# Altium PCB KOTROLER_TRANSPORTA.PcbDoc (part 3 of 4)
Units mm, origin at the board's own origin, x right, y up, seen from the top; angles counter-clockwise.
Board outline 160 x 100 mm, 2 copper layers (Top Layer, Bottom Layer); 436 components, 440 nets, 1414 pads, 154 vias.
Unrouted connection lines stored in the file: 1.
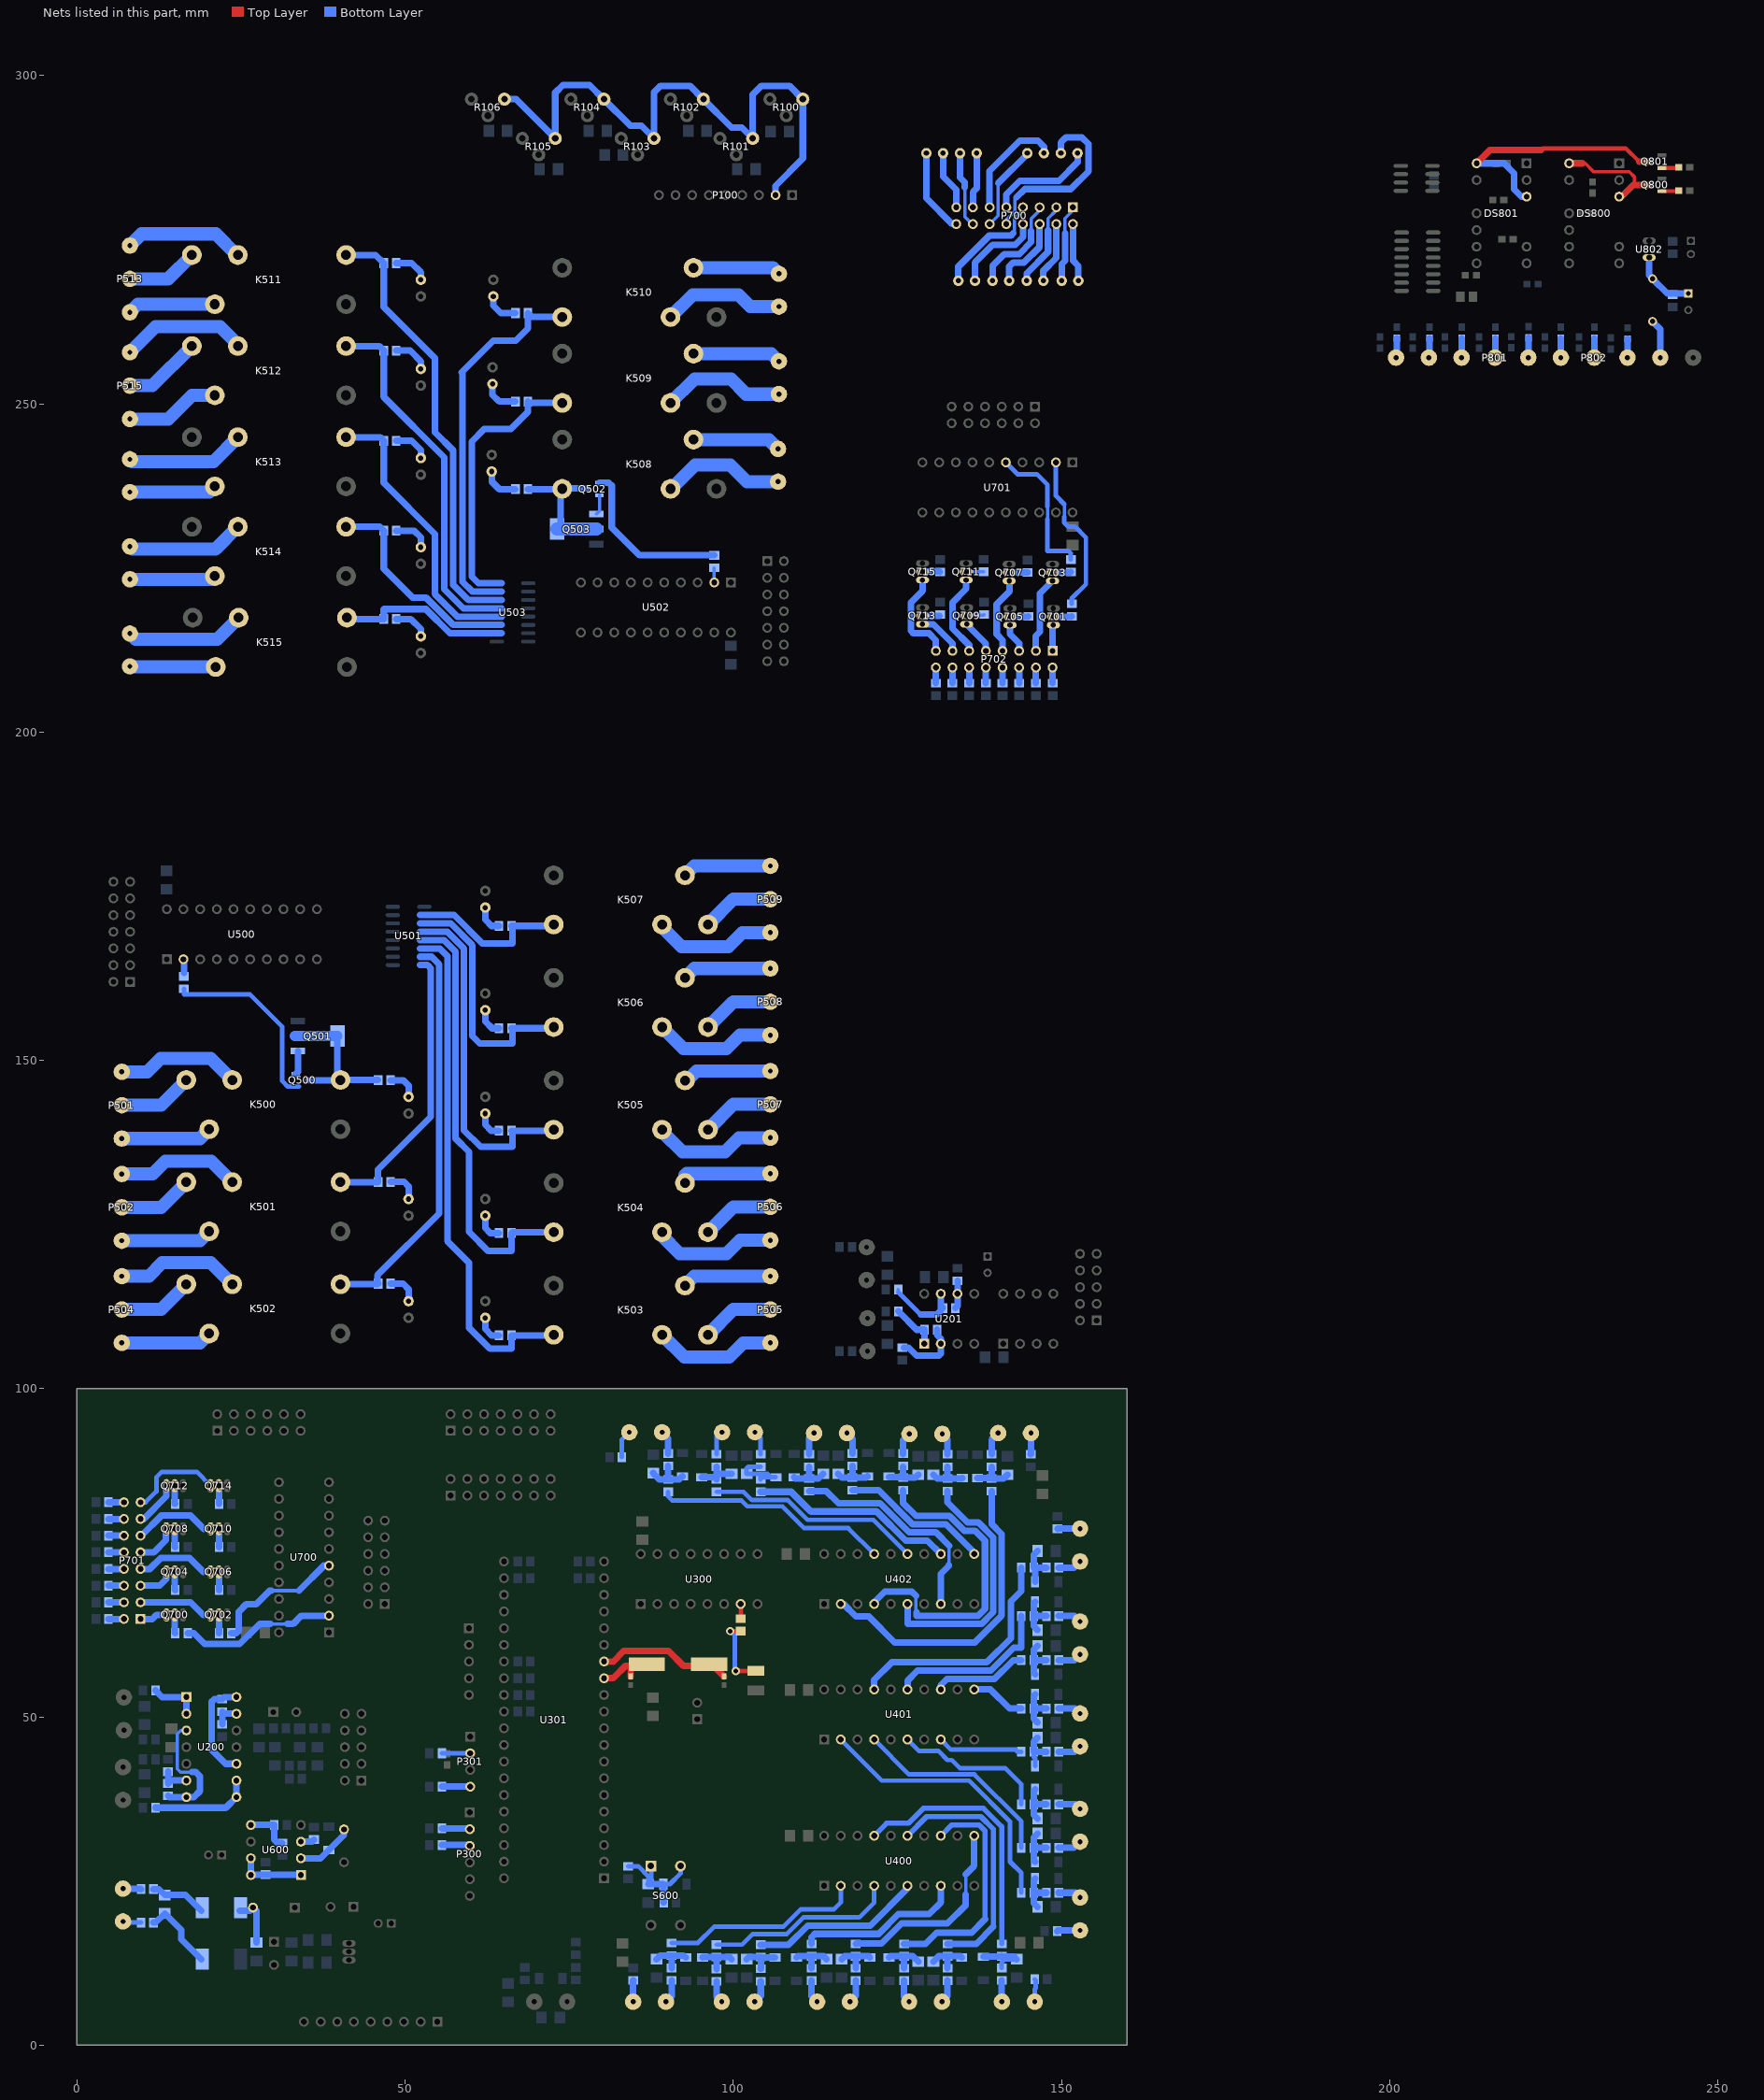
[diagram p3: the nets of this part, all layers, seen from the top]

## Via types
v1: diameter 1.27, hole 0.711, Top Layer to Bottom Layer, 154 vias

## Nets (pads, with @x,y where several pads share a name; then routed paths per layer and width w, separated by ;. In a path a pad name is that pad's centre, name@x,y a point inside that pad or via, vN(x,y) a via of type N, cw(c..) or ccw(c..) an arc to the next point about the centre after c; other vN are vias at no path point) (continued)
NetC303_2: C303.2 U301.14 Y300.2 | length 20.6
  Top Layer w0.7: Y300.2@96.223,57.818 Y300.2@96.949,57.818
  Top Layer w1: U301.14@80.297,58.453 81.694,58.453 83.312,60.071 90.109,60.071 92.362,57.818 Y300.2@96.223,57.818 ; Y300.2@96.949,57.818 C303.2@98.585,56.182
NetC304_2: C304.2 U301.13 Y300.1 | length 9
  Top Layer w1: U301.13@80.297,55.913 81.694,55.913 83.599,57.818 Y300.1@84.615,57.818 ; C304.2@84.361,56.182 84.361,57.564 Y300.1@84.615,57.818 ; Y300.1@86.723,57.818 Y300.1@84.615,57.818
NetC402_1: C402.1 D400.2 R401.2 R402.1 | length 6.7
  Bottom Layer w1: C402.1@88.298,13.117 88.869,13.688 R402.1@90.584,13.688 ; R401.2@90.584,11.778 R402.1@90.584,13.688 ; D400.2@92.743,13.365 92.42,13.688 R402.1@90.584,13.688
NetC403_1: C403.1 D401.2 R403.2 R404.1 | length 6.4
  Bottom Layer w1: D401.2@95.283,13.365 95.352,13.434 R404.1@97.442,13.434 ; R403.2@97.442,11.63 R404.1@97.442,13.434 ; C403.1@99.728,13.117 99.411,13.434 R404.1@97.442,13.434
NetC404_1: C404.1 D402.2 R405.2 R406.1 | length 7.9
  Bottom Layer w0.7: R405.2@104.173,11.651 R406.1@104.173,13.434
  Bottom Layer w1: C404.1@102.014,13.117 102.331,13.434 R406.1@104.173,13.434 ; R405.2@104.173,11.651 104.242,11.72 104.242,13.365 D402.2@106.332,13.365
NetC405_1: C405.1 D403.2 R407.2 R408.1 | length 6.6
  Bottom Layer w1: D403.2@109.634,13.365 109.83,13.561 R408.1@111.92,13.561 ; R407.2@111.92,11.757 R408.1@111.92,13.561 ; C405.1@114.206,13.117 113.762,13.561 R408.1@111.92,13.561
NetC406_1: C406.1 D404.2 R409.2 R410.1 | length 6.4
  Bottom Layer w1: C406.1@116.492,13.117 116.936,13.561 R410.1@118.651,13.561 ; R409.2@118.651,11.757 R410.1@118.651,13.561 ; D404.2@120.81,13.365 120.614,13.561 R410.1@118.651,13.561
NetC407_1: C407.1 D405.2 R411.2 R412.1 | length 6.7
  Bottom Layer w1: D405.2@123.731,13.365 123.927,13.561 R412.1@126.017,13.561 ; R411.2@126.017,11.757 R412.1@126.017,13.561 ; C407.1@128.176,12.736 127.351,13.561 R412.1@126.017,13.561
NetC408_1: C408.1 D406.2 R413.2 R414.1 | length 6.5
  Bottom Layer w1: C408.1@130.462,12.736 131.287,13.561 R414.1@132.621,13.561 ; R413.2@132.621,11.757 R414.1@132.621,13.561 ; D406.2@134.78,13.365 134.584,13.561 R414.1@132.621,13.561
NetC409_1: C409.1 D407.2 R415.2 R416.1 | length 8.6
  Bottom Layer w0.7: R415.2@140.876,11.778 140.876,12.609 141.384,13.117 C409.1@143.162,13.117
  Bottom Layer w1: D407.2@138.082,13.492 R416.1@140.876,13.492 ; R416.1@140.876,13.561 R416.1@140.876,13.492 ; C409.1@143.162,13.117 142.787,13.492 R416.1@140.876,13.492
NetC412_1: C412.1 D408.2 R419.2 R420.1 | length 6.5
  Bottom Layer w1: D408.2@145.959,25.397 145.763,25.201 R420.1@145.763,23.238 ; C412.1@146.334,21.079 145.763,21.65 R420.1@145.763,23.238 ; R419.2@147.673,23.238 R420.1@145.763,23.238
NetC413_1: C413.1 D409.2 R421.2 R422.1 | length 6.5
  Bottom Layer w1: D409.2@145.959,27.937 145.763,28.133 R422.1@145.763,30.096 ; C413.1@146.334,32.255 145.763,31.684 R422.1@145.763,30.096 ; R421.2@147.673,30.096 R422.1@145.763,30.096
NetC414_1: C414.1 D410.2 R423.2 R424.1 | length 6.7
  Bottom Layer w1: D410.2@145.959,38.986 145.763,38.79 R424.1@145.763,36.7 ; C414.1@146.334,34.541 145.763,35.112 R424.1@145.763,36.7 ; R423.2@147.673,36.7 R424.1@145.763,36.7
NetC415_1: C415.1 D411.2 R425.2 R426.1 | length 6.5
  Bottom Layer w0.7: R426.1@145.763,44.701 145.763,43.893 145.959,43.697 D411.2@145.959,42.542
  Bottom Layer w1: C415.1@146.334,46.86 145.763,46.289 R426.1@145.763,44.701 R425.2@147.673,44.701
NetC416_1: C416.1 D412.2 R427.2 R428.1 | length 6.5
  Bottom Layer w1: D412.2@145.959,53.464 145.763,53.268 R428.1@145.763,51.305 ; C416.1@146.334,49.146 145.763,49.717 R428.1@145.763,51.305 ; R427.2@147.673,51.305 R428.1@145.763,51.305
NetC417_1: C417.1 D413.2 R429.2 R430.1 | length 6.5
  Bottom Layer w1: D413.2@145.959,56.512 145.763,56.708 R430.1@145.763,58.671 ; C417.1@146.334,60.83 145.763,60.259 R430.1@145.763,58.671 ; R429.2@147.673,58.671 R430.1@145.763,58.671
NetC418_1: C418.1 D414.2 R431.2 R432.1 | length 6.5
  Bottom Layer w1: D414.2@145.959,67.561 145.763,67.365 R432.1@145.763,65.402 ; C418.1@146.334,63.243 145.763,63.814 R432.1@145.763,65.402 ; R431.2@147.673,65.402 R432.1@145.763,65.402
NetC419_1: C419.1 D415.2 R433.2 R434.1 | length 6.9
  Bottom Layer w1: D415.2@145.959,70.609 145.959,72.572 R434.1@145.763,72.768 ; C419.1@146.334,75.308 145.763,74.737 R434.1@145.763,72.768 ; R433.2@147.673,72.768 R434.1@145.763,72.768
NetC422_1: C422.1 D416.2 R437.2 R438.1 | length 6.6
  Bottom Layer w1: D416.2@137.179,86.396 R438.1@139.269,86.396 ; R437.2@139.338,88.11 139.338,86.465 R438.1@139.269,86.396 ; C422.1@141.751,86.898 141.18,86.327 139.338,86.327 R438.1@139.269,86.396
NetC423_1: C423.1 D417.2 R439.2 R440.1 | length 6.3
  Bottom Layer w1: D417.2@123.717,86.523 R440.1@125.807,86.523 ; R439.2@125.876,88.11 125.876,86.592 R440.1@125.807,86.523 ; C423.1@128.162,86.898 127.718,86.454 125.876,86.454 R440.1@125.807,86.523
NetC424_1: C424.1 D418.2 R441.2 R442.1 | length 6.5
  Bottom Layer w1: C424.1@130.448,86.898 131.019,86.327 R442.1@132.607,86.327 ; R441.2@132.607,88.11 R442.1@132.607,86.327 ; D418.2@134.893,86.396 134.824,86.327 R442.1@132.607,86.327
NetC425_1: C425.1 D419.2 R443.2 R444.1 | length 6.6
  Bottom Layer w1: D419.2@109.239,86.523 109.435,86.327 R444.1@111.525,86.327 ; R443.2@111.525,88.11 R444.1@111.525,86.327 ; C425.1@113.684,87.025 112.986,86.327 R444.1@111.525,86.327
NetC426_1: C426.1 D420.2 R445.2 R446.1 | length 6.5
  Bottom Layer w1: C426.1@115.97,87.025 116.541,86.454 R446.1@118.129,86.454 ; R445.2@118.129,88.237 R446.1@118.129,86.454 ; D420.2@120.415,86.65 120.219,86.454 R446.1@118.129,86.454
NetC427_1: C427.1 D421.2 R447.2 R448.1 | length 9.6
  Bottom Layer w0.7: R448.1@104.159,86.2 104.159,86.523 D421.2@105.722,86.523 ; R447.2@104.159,88.11 102.268,88.11 102,87.842 102,87.025 105.22,87.025 D421.2@105.722,86.523 ; D421.2@106.445,86.523 D421.2@105.722,86.523
NetC428_1: C428.1 D422.2 R449.2 R450.1 | length 6.7
  Bottom Layer w1: D422.2@95.142,86.523 97.105,86.523 97.428,86.2 97.428,86.901 ; R449.2@97.428,88.11 97.428,86.901 ; C428.1@99.714,87.025 97.552,87.025 97.428,86.901
NetC429_1: C429.1 D423.2 R451.2 R452.1 | length 7.1
  Bottom Layer w1: C429.1@87.776,87.152 87.865,87.152 87.865,87.062 88.728,86.2 R452.1@90.062,86.2 ; R451.2@90.062,88.237 R452.1@90.062,86.2 ; D423.2@92.221,86.65 91.771,86.2 R452.1@90.062,86.2
NetC601_1: C601.1 L601.2 R601.1 | length 11.6
  Bottom Layer w1: R601.1@11.651,18.702 11.974,18.702 C601.1@13.368,20.096 15.908,17.556 15.908,16.158 L601.2@18.952,13.114
NetC601_2: C601.2 L600.1 R600.1 | length 8.7
  Bottom Layer w1: R600.1@11.651,23.782 12.482,23.782 C601.2@13.368,22.896 16.536,22.896 L600.1@18.952,20.48
NetC602_2: C602.2 D600.1 L600.2 | length 7.8
  Bottom Layer w1: L600.2@24.802,20.48 26.322,20.48 D600.1@26.83,20.988 27.338,20.48 C602.2@27.338,15.657
NetC605_2: C605.2 U600.3 | length 2.1
  Bottom Layer w1: U600.3@34.109,31.021 35.781,31.021 C605.2@36.101,31.341
NetC610_2: C610.2 D602.1 R605.2 R606.1 S600.1 S600.3 | length 19.5
  Bottom Layer w0.7: R606.1@83.98,27.272 85.504,27.272 87.028,25.748 C610.2@87.028,24.547 C610.2@87.46,24.547 ; S600.1@87.445,27.306 87.46,27.291 C610.2@87.46,24.547 ; S600.3@91.945,27.306 91.945,26.163 90.329,24.547 C610.2@87.46,24.547
  Bottom Layer w1: C610.2@87.028,24.547 87.031,24.544 D602.1@89.317,24.544 89.317,21.813 R605.2@89.38,21.75
NetC802_1: C802.1 C804.1 R825.2 U802.3 | length 9.8
  Bottom Layer w1: U802.3@239.522,272.288 239.522,269.569 R825.2@240.03,269.061 242.284,266.807 C802.1@245.491,266.807
NetD300_2: D300.2 R302.2 | length 11.1
  Top Layer w0.7: v1(99.515,63.091) R302.2@101.125,63.091 ; v1(100.388,57.032) D300.2@103.411,57.032
  Bottom Layer w0.7: v1(99.515,63.091) 100.236,62.37 100.236,57.184 v1(100.388,57.032)
NetD500_2: D500.2 R500.1 | length 4.8
  Bottom Layer w1: R500.1@47.783,146.995 49.69,146.995 50.516,146.169 D500.2@50.516,144.455
NetD501_2: D501.2 R501.1 | length 4.9
  Bottom Layer w1: R501.1@47.783,131.501 49.817,131.501 50.516,130.802 D501.2@50.516,128.898
NetD502_2: D502.2 R502.1 | length 4.9
  Bottom Layer w1: R502.1@47.783,116.007 49.69,116.007 50.516,115.181 D502.2@50.516,113.34
NetD503_2: D503.2 R503.1 | length 4.2
  Bottom Layer w1: D503.2@62.2,110.8 62.2,109.085 63.152,108.133 R503.1@64.298,108.133
NetD504_2: D504.2 R505.1 | length 4.3
  Bottom Layer w1: D504.2@62.2,126.358 62.2,124.452 62.93,123.722 R505.1@64.298,123.722
NetD505_2: D505.2 R506.1 | length 4.2
  Bottom Layer w1: D505.2@62.2,141.915 62.2,140.2 63.089,139.312 R506.1@64.298,139.312
NetD506_2: D506.2 R507.1 | length 4.2
  Bottom Layer w1: D506.2@62.2,157.663 62.2,155.948 63.247,154.901 R507.1@64.298,154.901
NetD507_2: D507.2 R508.1 | length 4.3
  Bottom Layer w1: D507.2@62.2,173.284 62.2,171.442 63.152,170.49 R508.1@64.298,170.49
NetD508_2: D508.2 R510.1 | length 5.6
  Bottom Layer w1: D508.2@63.181,239.697 63.181,238.173 64.324,237.03 R510.1@66.803,237.03
NetD509_2: D509.2 R511.1 | length 5.6
  Bottom Layer w1: D509.2@63.308,253.032 63.308,251.381 64.324,250.365 R511.1@66.803,250.365
NetD510_2: D510.2 R512.1 | length 5.2
  Bottom Layer w1: D510.2@63.435,266.367 63.435,264.97 64.578,263.827 R512.1@66.803,263.827
NetD511_2: D511.2 R513.1 | length 5.5
  Bottom Layer w1: R513.1@48.637,271.447 50.989,271.447 52.386,270.05 D511.2@52.386,268.907
NetD512_2: D512.2 R514.1 | length 5.6
  Bottom Layer w1: R514.1@48.637,258.112 50.735,258.112 52.386,256.461 D512.2@52.386,255.331
NetD513_2: D513.2 R515.1 | length 5.6
  Bottom Layer w1: R515.1@48.637,244.396 50.989,244.396 52.386,242.999 D513.2@52.386,241.754
NetD514_2: D514.2 R516.1 | length 5.7
  Bottom Layer w1: R516.1@48.637,230.68 51.37,230.68 52.386,229.664 D514.2@52.386,228.178
NetD515_2: D515.2 R517.1 | length 5.5
  Bottom Layer w1: R517.1@48.637,217.218 50.862,217.218 52.386,215.694 D515.2@52.386,214.601
NetD601_2: D601.2 L602.1 U600.2 | length 8.1
  Bottom Layer w1: U600.2@34.109,28.481 37.114,28.481 D601.2@38.387,29.754 40.673,32.04 40.673,32.136
NetD700_1: D700.1 P700.2 | length 9
  Bottom Layer w1: P700.2@151.737,277.39 151.782,277.345 151.782,271.818 152.56,271.04 D700.1@152.56,268.754
NetD700_2: D700.2 P700.1 | length 11.9
  Bottom Layer w0.5: 150.528,275.993 150.483,276.038 150.483,278.234 151.737,279.488 P700.1@151.737,279.93
  Bottom Layer w1: D700.2@150.02,268.754 150.02,271.294 150.528,271.802 150.528,275.993
NetD701_1: D701.1 P700.4 | length 9.5
  Bottom Layer w1: D701.1@147.226,268.754 147.226,270.278 149.197,272.249 P700.4@149.197,277.39
NetD701_2: D701.2 P700.3 | length 13
  Bottom Layer w0.5: 147.943,276.419 147.943,278.234 149.197,279.488 P700.3@149.197,279.93
  Bottom Layer w1: D701.2@144.686,268.754 144.686,269.897 147.943,273.154 147.943,276.419
NetD702_1: D702.1 P700.6 | length 11.5
  Bottom Layer w1: D702.1@142.019,268.754 142.019,270.913 142.654,271.548 144.305,271.548 146.657,273.9 P700.6@146.657,277.39
NetD702_2: D702.2 P700.5 | length 15.5
  Bottom Layer w0.5: 145.371,276.324 145.371,278.202 146.657,279.488 P700.5@146.657,279.93
  Bottom Layer w1: D702.2@139.479,268.754 139.479,271.04 141.257,272.818 143.543,272.818 145.371,274.646 145.371,276.324
NetD703_1: D703.1 P700.8 | length 13.7
  Bottom Layer w1: D703.1@136.812,268.754 136.812,271.548 139.479,274.215 142.908,274.215 144.117,275.424 P700.8@144.117,277.39
NetD703_2: D703.2 P700.7 | length 17.2
  Bottom Layer w0.5: 142.654,275.993 142.831,276.17 142.831,278.202 144.117,279.488 P700.7@144.117,279.93
  Bottom Layer w1: D703.2@134.272,268.754 134.272,270.913 138.971,275.612 142.273,275.612 142.654,275.993
NetD704_1: D704.1 P700.10 | length 28
  Bottom Layer w0.5: P700.10@141.577,277.39 141.577,278.014 142.863,279.3 142.863,281.155 143.162,281.454
  Bottom Layer w1: 143.162,281.454 144.432,282.724 151.417,282.724 154.084,285.391 154.084,289.582 153.068,290.598 150.655,290.598 149.893,289.836 D704.1@149.893,288.185
NetD704_2: D704.2 P700.9 | length 16.2
  Bottom Layer w1: P700.9@141.577,279.93 141.577,281.912 143.643,283.978 149.612,283.978 152.433,286.799 D704.2@152.433,288.185
NetD705_1: D705.1 P700.12 | length 13.2
  Bottom Layer w0.5: P700.12@139.037,277.39 140.323,278.676 140.323,280.461 140.335,280.473 140.335,283.591
  Bottom Layer w1: 140.335,283.591 144.771,288.027 D705.1@144.771,288.185
NetD705_2: D705.2 P700.11 | length 17.1
  Bottom Layer w1: P700.11@139.037,279.93 139.037,285.468 143.637,290.068 146.431,290.068 147.311,289.188 D705.2@147.311,288.185
NetD706_1: D706.1 P700.14 | length 11.7
  Bottom Layer w0.5: 135.255,282.956 135.255,280.473 135.243,280.461 135.243,278.523 P700.14@136.376,277.39
  Bottom Layer w1: D706.1@134.526,288.185 134.526,284.492 135.255,283.763 135.255,282.956 ; P700.14@136.376,277.39 P700.14@136.497,277.39
NetD706_2: D706.2 P700.13 | length 8.5
  Bottom Layer w1: P700.13@136.497,279.93 136.497,282.293 137.066,282.862 D706.2@137.066,288.185
NetD707_1: D707.1 P700.16 | length 13
  Bottom Layer w1: D707.1@129.404,288.185 129.404,281.314 133.328,277.39 P700.16@133.957,277.39
NetD707_2: D707.2 P700.15 | length 9.1
  Bottom Layer w1: D707.2@131.944,288.185 131.944,284.616 133.957,282.603 P700.15@133.957,279.93
NetDS800_3: DS800.3 DS800.14 Q800.3 | length 17.2
  Top Layer w0.5: 229.346,286.639 229.765,286.639 231.035,285.369 236.474,285.369 237.236,284.607 237.236,283.464 237.109,283.337
  Top Layer w1: DS800.14@227.33,286.639 229.346,286.639 ; DS800.3@234.95,281.559 235.331,281.559 237.109,283.337 Q800.3@239.361,283.337
NetDS801_3: DS801.3 DS801.14 Q801.3 | length 39.1
  Top Layer w0.6: 223.091,288.671 223.345,288.925 235.966,288.925 237.998,286.893
  Top Layer w1: DS801.14@213.233,286.639 215.265,288.671 223.091,288.671 ; 237.998,286.893 Q801.3@239.361,286.893
  Bottom Layer w1: DS801.14@213.233,286.639 217.424,286.639 218.948,285.115 218.948,282.702 220.091,281.559 DS801.3@220.853,281.559
NetK500_2: K500.2 Q500.3 Q501.2 Q501.4 R500.2 | length 23.8
  Bottom Layer w1: Q500.3@35.437,146.995 40.11,146.995 K500.2@40.15,147.035 ; Q501.4@39.673,153.726 39.673,147.512 K500.2@40.15,147.035 ; R500.2@45.843,147.035 K500.2@40.15,147.035
  Bottom Layer w1.5: Q501.2@33.18,153.726 Q501.4@39.673,153.726
NetK500_3: K500.3 P501.1 | length 19
  Bottom Layer w2: P501.1@6.828,148.265 10.701,148.265 12.733,150.297 20.388,150.297 K500.3@23.65,147.035
NetK500_4: K500.4 P501.3 | length 13.9
  Bottom Layer w2: P501.3@6.828,138.105 18.72,138.105 K500.4@20.15,139.535
NetK500_5: K500.5 P501.2 | length 11.4
  Bottom Layer w2: P501.2@6.828,143.185 12.8,143.185 K500.5@16.65,147.035
NetK501_2: K501.2 R501.2 U501.16 | length 43.5
  Bottom Layer w1: K501.2@40.15,131.478 45.859,131.478 45.859,133.386 53.913,141.439 53.913,164.013 53.405,164.521 U501.16@52.23,164.521
NetK501_3: K501.3 P502.1 | length 19
  Bottom Layer w2: P502.1@6.828,132.708 11.527,132.708 13.495,134.676 20.452,134.676 K501.3@23.65,131.478
NetK501_4: K501.4 P502.3 | length 13.9
  Bottom Layer w2: P502.3@6.828,122.548 18.72,122.548 K501.4@20.15,123.978
NetK501_5: K501.5 P502.2 | length 11.4
  Bottom Layer w2: P502.2@6.828,127.628 12.8,127.628 K501.5@16.65,131.478
NetK502_2: K502.2 R502.2 U501.15 | length 61.8
  Bottom Layer w1: K502.2@40.15,115.92 R502.2@45.796,115.92 ; R502.2@45.883,116.007 R502.2@45.796,115.92 ; U501.15@52.23,165.791 54.024,165.791 55.167,164.648 55.167,126.691 45.796,117.32 R502.2@45.796,115.92
NetK502_3: K502.3 P504.1 | length 19
  Bottom Layer w2: P504.1@6.828,117.15 10.955,117.15 12.987,119.182 20.388,119.182 K502.3@23.65,115.92
NetK502_4: K502.4 P504.3 | length 13.9
  Bottom Layer w2: P504.3@6.828,106.99 18.72,106.99 K502.4@20.15,108.42
NetK502_5: K502.5 P504.2 | length 11.4
  Bottom Layer w2: P504.2@6.828,112.07 12.8,112.07 K502.5@16.65,115.92
NetK503_2: K503.2 R503.2 U501.14 | length 79
  Bottom Layer w1: U501.14@52.23,167.061 55.278,167.061 56.421,165.918 56.421,122.484 59.723,119.182 59.723,109.276 62.898,106.101 66.2,106.101 66.2,108.131 R503.2@66.198,108.133 72.542,108.133 K503.2@72.629,108.22
NetK503_3: K503.3 P505.1 | length 18.8
  Bottom Layer w2: K503.3@89.129,108.22 92.518,104.831 99.347,104.831 101.506,106.99 P505.1@105.634,106.99
NetK503_4: K503.4 P505.3 | length 13.6
  Bottom Layer w2: K503.4@92.629,115.72 94.059,117.15 P505.3@105.634,117.15
NetK503_5: K503.5 P505.2 | length 11.1
  Bottom Layer w2: K503.5@96.129,108.22 99.979,112.07 P505.2@105.634,112.07
NetK504_2: K504.2 R505.2 U501.13 | length 66.6
  Bottom Layer w1: U501.13@52.23,168.331 55.922,168.331 57.691,166.562 57.691,138.105 59.723,136.073 59.723,123.881 62.644,120.96 66.2,120.96 66.2,123.72 R505.2@66.198,123.722 66.317,123.841 K504.2@72.629,123.841
NetK504_3: K504.3 P506.1 | length 19
  Bottom Layer w2: K504.3@89.129,123.841 89.129,123.304 91.854,120.579 98.966,120.579 100.998,122.611 P506.1@105.634,122.611
NetK504_4: K504.4 P506.3 | length 14.3
  Bottom Layer w2: K504.4@92.629,131.341 92.629,132.53 92.87,132.771 P506.3@105.634,132.771
NetK504_5: K504.5 P506.2 | length 11.1
  Bottom Layer w2: K504.5@96.129,123.841 99.979,127.691 P506.2@105.634,127.691
NetK505_2: K505.2 R506.2 U501.12 | length 52.9
  Bottom Layer w1: U501.12@52.23,169.601 56.426,169.601 58.961,167.066 58.961,139.375 61.501,136.835 66.327,136.835 66.327,139.183 R506.2@66.198,139.312 72.479,139.312 K505.2@72.629,139.462
NetK505_3: K505.3 P507.1 | length 19
  Bottom Layer w2: K505.3@89.129,139.462 89.129,139.179 92.235,136.073 98.712,136.073 100.871,138.232 P507.1@105.634,138.232
NetK505_4: K505.4 P507.3 | length 13.6
  Bottom Layer w2: K505.4@92.629,146.962 92.964,146.962 94.394,148.392 P507.3@105.634,148.392
NetK505_5: K505.5 P507.2 | length 11.1
  Bottom Layer w2: K505.5@96.129,139.462 99.979,143.312 P507.2@105.634,143.312
NetK506_2: K506.2 R507.2 U501.11 | length 38.7
  Bottom Layer w1: U501.11@52.23,170.871 56.929,170.871 60.231,167.569 60.231,153.726 61.374,152.583 66.327,152.583 66.327,154.772 R507.2@66.198,154.901 72.447,154.901 K506.2@72.629,155.083
NetK506_3: K506.3 P508.1 | length 18.7
  Bottom Layer w2: K506.3@89.129,155.083 92.391,151.821 98.966,151.821 100.998,153.853 P508.1@105.634,153.853
NetK506_4: K506.4 P508.3 | length 13.6
  Bottom Layer w2: K506.4@92.629,162.583 94.059,164.013 P508.3@105.634,164.013
NetK506_5: K506.5 P508.2 | length 11.1
  Bottom Layer w2: K506.5@96.129,155.083 99.979,158.933 P508.2@105.634,158.933
NetK507_2: K507.2 R508.2 U501.10 | length 25.1
  Bottom Layer w1: U501.10@52.23,172.141 57.437,172.141 61.755,167.823 66.327,167.823 66.327,170.361 R508.2@66.198,170.49 72.415,170.49 K507.2@72.629,170.704
NetK507_3: K507.3 P509.1 | length 19
  Bottom Layer w2: K507.3@89.129,170.704 89.129,170.294 92.108,167.315 99.22,167.315 101.379,169.474 P509.1@105.634,169.474
NetK507_4: K507.4 P509.3 | length 13.6
  Bottom Layer w2: K507.4@92.629,178.204 94.059,179.634 P509.3@105.634,179.634
NetK507_5: K507.5 P509.2 | length 11.1
  Bottom Layer w2: K507.5@96.129,170.704 99.979,174.554 P509.2@105.634,174.554
NetK508_2: K508.2 Q502.3 Q503.2 Q503.4 R510.2 | length 21.2
  Bottom Layer w0.5: Q503.4@73.135,230.934 Q503.4@73.674,231.473 ; Q502.3@77.411,237.117 Q502.3@77.498,237.03
  Bottom Layer w1: R510.2@68.703,237.03 K508.2@73.587,237.03 ; Q503.4@73.674,231.473 73.674,237.117 Q502.3@77.411,237.117
  Bottom Layer w2: Q503.4@73.135,230.934 Q503.2@79.135,230.934
NetK508_3: K508.3 P510.1 | length 19.1
  Bottom Layer w2: K508.3@90.301,237.067 90.523,237.067 94.169,240.713 99.503,240.713 102.067,238.15 P510.1@106.806,238.15
NetK508_4: K508.4 P510.2 | length 13.6
  Bottom Layer w2: K508.4@93.801,244.567 105.388,244.567 P510.2@106.806,243.15
NetK509_2: K509.2 R511.2 U503.16 | length 42.9
  Bottom Layer w1: U503.16@64.705,222.679 U503.16@63.956,222.679 61.149,222.679 60.133,223.695 60.133,244.269 62.038,246.174 66.102,246.174 68.703,248.775 R511.2@68.703,250.365 68.92,250.148 K509.2@73.928,250.148
NetK509_3: K509.3 P511.1 | length 19
  Bottom Layer w2: K509.3@90.428,250.148 94.074,253.794 99.63,253.794 101.94,251.485 P511.1@106.933,251.485
NetK509_4: K509.4 P511.2 | length 13.5
  Bottom Layer w2: K509.4@93.928,257.648 105.769,257.648 P511.2@106.933,256.485
NetK510_2: K510.2 R512.2 U503.15 | length 59.2
  Bottom Layer w1: 58.609,254.81 63.435,259.636 66.864,259.636 68.703,261.475 R512.2@68.703,263.827 69.301,263.229 K510.2@73.928,263.229 ; 58.736,254.81 58.736,222.933 60.26,221.409 U503.15@63.956,221.409 U503.15@64.705,221.409
NetK510_3: K510.3 P512.1 | length 18.7
  Bottom Layer w2: K510.3@90.428,263.229 93.82,266.621 100.773,266.621 102.575,264.82 P512.1@106.933,264.82
NetK510_4: K510.4 P512.2 | length 13.4
  Bottom Layer w2: K510.4@93.928,270.729 106.023,270.729 P512.2@106.933,269.82
NetK511_2: K511.2 R513.2 U503.14 | length 68
  Bottom Layer w1: K511.2@41.004,272.68 45.504,272.68 R513.2@46.737,271.447 46.737,264.777 54.545,256.969 54.545,245.666 57.339,242.872 57.339,222.425 59.625,220.139 U503.14@63.956,220.139 U503.14@64.705,220.139
NetK511_3: K511.3 P513.1 | length 18.5
  Bottom Layer w2: P513.1@8.063,274.114 9.841,275.892 21.144,275.892 24.356,272.68 K511.3@24.504,272.68
NetK511_4: K511.4 P513.3 | length 13.4
  Bottom Layer w2: P513.3@8.063,263.954 9.289,265.18 K511.4@21.004,265.18
NetK511_5: K511.5 P513.2 | length 11
  Bottom Layer w2: P513.2@8.063,269.034 13.858,269.034 K511.5@17.504,272.68
NetK512_2: K512.2 R514.2 U503.13 | length 56.1
  Bottom Layer w1: K512.2@41.004,258.805 46.044,258.805 R514.2@46.737,258.112 46.737,251.061 55.942,241.856 55.942,221.79 58.863,218.869 U503.13@63.956,218.869 U503.13@64.705,218.869
NetK512_3: K512.3 P515.1 | length 19.5
  Bottom Layer w2: P515.1@8.063,257.858 12,261.795 21.779,261.795 24.504,259.07 K512.3@24.504,258.805
NetK512_4: K512.4 P515.3 | length 14.4
  Bottom Layer w2: P515.3@8.063,247.698 13.905,247.698 17.512,251.305 K512.4@21.004,251.305
NetK512_5: K512.5 P515.2 | length 11.9
  Bottom Layer w2: P515.2@8.063,252.778 11.477,252.778 K512.5@17.504,258.805
NetK513_2: K513.2 R515.2 U503.12 | length 44.1
  Bottom Layer w1: K513.2@41.004,244.931 46.203,244.931 R515.2@46.737,244.396 46.737,237.98 54.545,230.172 54.545,221.028 57.974,217.599 U503.12@63.956,217.599 U503.12@64.705,217.599
NetK513_3: K513.3 P516.1 | length 18.1
  Bottom Layer w2: P516.1@8.063,241.562 8.404,241.221 20.795,241.221 K513.3@24.504,244.931
NetK513_4: K513.4 P516.2 | length 13.3
  Bottom Layer w2: P516.2@8.063,236.562 20.136,236.562 K513.4@21.004,237.431
NetK514_2: K514.2 R516.2 U503.11 | length 33.3
  Bottom Layer w1: K514.2@41.004,231.278 46.139,231.278 R516.2@46.737,230.68 46.737,224.899 51.116,220.52 53.148,220.52 57.339,216.329 U503.11@63.956,216.329 U503.11@64.705,216.329
NetK514_3: K514.3 P518.1 | length 18
  Bottom Layer w2: P518.1@8.063,228.291 8.468,227.886 21.112,227.886 K514.3@24.504,231.278
NetK514_4: K514.4 P518.2 | length 13.1
  Bottom Layer w2: P518.2@8.063,223.291 20.517,223.291 K514.4@21.004,223.778
NetK515_2: K515.2 R517.2 U503.10 | length 26.6
  Bottom Layer w0.7: 46.737,218.681 46.798,218.742
  Bottom Layer w1: K515.2@41.084,217.182 R517.2@46.737,217.218 46.737,218.681 ; 46.798,218.742 53.148,218.742 56.831,215.059 U503.10@63.956,215.059 U503.10@64.705,215.059
NetK515_3: K515.3 P519.1 | length 18.3
  Bottom Layer w2: P519.1@8.063,215.019 8.912,214.17 21.366,214.17 K515.3@24.631,217.435
NetK515_4: K515.4 P519.2 | length 13.1
  Bottom Layer w2: P519.2@8.063,210.019 8.147,209.935 K515.4@21.131,209.935
NetP100_2: P100.2 R100.1 R101.1 R102.1 R103.1 R104.1 R105.1 R106.1 | length 93.9
  Bottom Layer w1: R106.1@65.111,296.398 66.889,296.398 R105.1@72.858,290.429 72.858,297.394 74.041,298.577 78.087,298.577 R104.1@80.266,296.398 84.31,292.354 85.983,292.354 R103.1@87.908,290.429 87.908,297.458 88.9,298.45 93.37,298.45 R102.1@95.422,296.398 99.72,292.1 101.286,292.1 R101.1@102.957,290.429 102.957,297.14 104.267,298.45 108.525,298.45 R100.1@110.577,296.398 110.577,287.361 106.426,283.21 P100.2@106.426,281.813
NetP300_2: P300.2 R300.2 | length 4.3
  Bottom Layer w0.7: P300.2@59.723,33.053 P300.2@59.85,32.926
  Bottom Layer w1: R300.2@55.593,33.053 P300.2@59.723,33.053
NetP300_3: P300.3 R301.2 | length 4.3
  Bottom Layer w0.7: P300.3@59.723,30.513 P300.3@59.85,30.386
  Bottom Layer w1: R301.2@55.593,30.513 P300.3@59.723,30.513
NetP301_2: P301.2 R303.2 | length 4.3
  Bottom Layer w0.7: R303.2@55.593,44.483 P301.2@59.914,44.483
NetP301_4: P301.4 R304.2 | length 4.3
  Bottom Layer w1: R304.2@55.593,39.403 P301.4@59.914,39.403
NetP400_1: P400.1 R401.1 | length 3.6
  Bottom Layer w1: P400.1@89.728,6.637 90.584,7.493 R401.1@90.584,9.878
NetP400_2: P400.2 R400.1 | length 3.2
  Bottom Layer w1: P400.2@84.728,6.637 84.728,9.864 R400.1@84.742,9.878
NetP401_1: P401.1 R405.1 | length 3.5
  Bottom Layer w1: P401.1@103.235,6.637 104.173,7.575 R405.1@104.173,9.751
NetP401_2: P401.2 R403.1 | length 3.4
  Bottom Layer w1: R403.1@97.442,9.73 97.442,7.43 P401.2@98.235,6.637
NetP402_1: P402.1 R409.1 | length 3.6
  Bottom Layer w1: P402.1@117.758,6.637 118.651,7.53 R409.1@118.651,9.857
NetP402_2: P402.2 R407.1 | length 3.6
  Bottom Layer w1: R407.1@111.92,9.857 111.92,7.475 P402.2@112.758,6.637
NetP403_1: P403.1 R413.1 | length 3.6
  Bottom Layer w1: P403.1@131.774,6.637 132.621,7.484 R413.1@132.621,9.857
NetP403_2: P403.2 R411.1 | length 3.5
  Bottom Layer w1: R411.1@126.017,9.857 126.017,7.394 P403.2@126.774,6.637
NetP404_1: P404.1 R417.1 | length 3.6
  Bottom Layer w0.7: R417.1@145.895,10.066 146.062,9.899 146.062,8.702 145.916,8.556 P404.1@145.916,6.637
NetP404_2: P404.2 R415.1 | length 3.3
  Bottom Layer w1: R415.1@140.876,9.878 140.876,6.677 P404.2@140.916,6.637
NetP405_1: P405.1 R419.1 | length 3.5
  Bottom Layer w1: R419.1@149.573,23.238 152.085,23.238 P405.1@152.814,22.508
NetP405_2: P405.2 R418.1 | length 3.5
  Bottom Layer w1: R418.1@149.319,17.396 149.432,17.508 P405.2@152.814,17.508
NetP406_1: P406.1 R423.1 | length 3.5
  Bottom Layer w1: R423.1@149.573,36.7 152.13,36.7 P406.1@152.814,36.016
NetP406_2: P406.2 R421.1 | length 3.6
  Bottom Layer w1: R421.1@149.573,30.096 151.894,30.096 P406.2@152.814,31.016
NetP407_1: P407.1 R427.1 | length 3.6
  Bottom Layer w1: R427.1@149.573,51.305 152.048,51.305 P407.1@152.814,50.539
NetP407_2: P407.2 R425.1 | length 3.6
  Bottom Layer w1: R425.1@149.573,44.701 151.976,44.701 P407.2@152.814,45.539
NetP408_1: P408.1 R431.1 | length 3.6
  Bottom Layer w1: R431.1@149.573,65.402 151.967,65.402 P408.1@152.814,64.554
NetP408_2: P408.2 R429.1 | length 3.6
  Bottom Layer w1: R429.1@149.573,58.671 151.93,58.671 P408.2@152.814,59.554
NetP409_1: P409.1 R435.1 | length 3.4
  Bottom Layer w1: R435.1@149.385,78.676 149.406,78.697 P409.1@152.814,78.697
NetP409_2: P409.2 R433.1 | length 3.6
  Bottom Layer w1: R433.1@149.573,72.768 151.885,72.768 P409.2@152.814,73.697
NetP410_1: P410.1 R437.1 | length 3.6
  Bottom Layer w1: R437.1@139.338,90.01 139.338,92.268 P410.1@140.321,93.251
NetP410_2: P410.2 R436.1 | length 3.2
  Bottom Layer w1: R436.1@145.307,90.01 145.321,90.024 P410.2@145.321,93.251
NetP411_1: P411.1 R441.1 | length 3.4
  Bottom Layer w1: P411.1@131.814,93.124 132.607,92.331 R441.1@132.607,90.01
NetP411_2: P411.2 R439.1 | length 3.5
  Bottom Layer w1: R439.1@125.876,90.01 125.876,92.186 P411.2@126.814,93.124
NetP412_1: P412.1 R445.1 | length 3.5
  Bottom Layer w1: P412.1@117.29,93.251 118.129,92.413 R445.1@118.129,90.137
NetP412_2: P412.2 R443.1 | length 3.6
  Bottom Layer w1: R443.1@111.525,90.01 111.525,92.485 P412.2@112.29,93.251
NetP413_1: P413.1 R449.1 | length 4.2
  Bottom Layer w0.7: R449.1@97.428,90.01 97.428,93.378 P413.1@98.275,93.378
NetP413_2: P413.2 R447.1 | length 3.7
  Bottom Layer w0.7: P413.2@103.275,93.378 104.159,92.494 R447.1@104.159,90.01
NetP414_1: P414.1 R453.1 | length 4.3
  Bottom Layer w0.7: R453.1@83.011,89.568 83.011,92.256 P414.1@84.133,93.378
NetP414_2: P414.2 R451.1 | length 3.6
  Bottom Layer w1: P414.2@89.133,93.378 90.062,92.449 R451.1@90.062,90.137
NetP600_1: P600.1 R601.2 | length 2.9
  Bottom Layer w0.7: P600.1@7.018,18.869 7.018,18.702 R601.2@9.751,18.702
NetP600_2: P600.2 R600.2 | length 2.8
  Bottom Layer w1: P600.2@7.018,23.869 9.664,23.869 R600.2@9.751,23.782
NetP701_1: P701.1 Q700.1 | length 4.2
  Bottom Layer w1: P701.1@9.685,64.93 11.463,64.93 12.083,65.55 Q700.1@13.622,65.55
NetP701_2: P701.2 R704.1 | length 2.4
  Bottom Layer w1: R704.1@4.793,64.93 P701.2@7.145,64.93
NetP701_3: P701.3 Q702.1 | length 11.5
  Bottom Layer w1: P701.3@9.685,67.47 17.305,67.47 19.225,65.55 Q702.1@20.353,65.55
NetP701_4: P701.4 R707.1 | length 2.4
  Bottom Layer w1: R707.1@4.793,67.47 P701.4@7.145,67.47
NetP701_5: P701.5 Q704.1 | length 5.4
  Bottom Layer w1: P701.5@9.685,70.01 12.606,70.01 13.622,71.026 Q704.1@13.622,72.112
NetP701_6: P701.6 R710.1 | length 2.4
  Bottom Layer w1: R710.1@4.793,70.01 P701.6@7.145,70.01
NetP701_7: P701.7 Q706.1 | length 12.2
  Bottom Layer w1: P701.7@9.685,72.55 11.082,72.55 12.733,74.201 17.178,74.201 19.267,72.112 Q706.1@20.353,72.112
NetP701_8: P701.8 R712.1 | length 2.4
  Bottom Layer w1: R712.1@4.793,72.55 P701.8@7.145,72.55
NetP701_9: P701.9 Q708.1 | length 6.4
  Bottom Layer w1: P701.9@9.685,75.09 11.717,75.09 13.554,76.927 13.554,78.605 Q708.1@13.622,78.673
NetP701_10: P701.10 R714.1 | length 2.4
  Bottom Layer w1: R714.1@4.793,75.09 P701.10@7.145,75.09
NetP701_11: P701.11 Q710.1 | length 12.8
  Bottom Layer w1: P701.11@9.685,77.63 9.812,77.63 12.86,80.678 17.305,80.678 19.31,78.673 Q710.1@20.353,78.673
NetP701_12: P701.12 R718.1 | length 2.4
  Bottom Layer w1: R718.1@4.793,77.63 P701.12@7.145,77.63
NetP701_13: P701.13 Q712.1 | length 7
  Bottom Layer w1: P701.13@9.685,80.17 10.193,80.17 13.622,83.599 Q712.1@13.622,85.235
NetP701_14: P701.14 R720.1 | length 2.4
  Bottom Layer w1: R720.1@4.793,80.17 P701.14@7.145,80.17
NetP701_15: P701.15 Q714.1 | length 14.7
  Bottom Layer w0.7: P701.15@9.685,82.71 10.458,82.71 12.098,84.35 12.098,86.52 12.916,87.338 18.25,87.338 Q714.1@20.353,85.235
NetP701_16: P701.16 R722.1 | length 2.4
  Bottom Layer w1: R722.1@4.793,82.71 P701.16@7.145,82.71
NetP702_1: P702.1 Q701.1 | length 3.8
  Bottom Layer w1: P702.1@148.623,212.377 Q701.1@148.623,216.187
NetP702_2: P702.2 R705.1 | length 2.4
  Bottom Layer w1: R705.1@148.623,207.485 P702.2@148.623,209.837
NetP702_3: P702.3 Q703.1 | length 11.7
  Bottom Layer w1: P702.3@146.083,212.377 146.083,214.663 146.718,215.298 146.718,221.14 Q703.1@148.623,223.045
NetP702_4: P702.4 R709.1 | length 2.4
  Bottom Layer w1: R709.1@146.083,207.485 P702.4@146.083,209.837
NetP702_5: P702.5 Q705.1 | length 4.5
  Bottom Layer w1: Q705.1@142.146,216.314 142.146,214.917 143.543,213.52 P702.5@143.543,212.377
NetP702_6: P702.6 R711.1 | length 2.4
  Bottom Layer w1: R711.1@143.543,207.485 P702.6@143.543,209.837
NetP702_7: P702.7 Q707.1 | length 11.9
  Bottom Layer w1: P702.7@141.003,212.377 141.003,214.028 140.114,214.917 140.114,219.489 142.104,221.479 142.104,223.045 Q707.1@142.019,223.045
NetP702_8: P702.8 R713.1 | length 2.4
  Bottom Layer w1: R713.1@141.003,207.485 P702.8@141.003,209.837
NetP702_9: P702.9 Q709.1 | length 5.3
  Bottom Layer w1: Q709.1@135.542,216.441 138.463,213.52 P702.9@138.463,212.377
NetP702_10: P702.10 R716.1 | length 2.4
  Bottom Layer w1: R716.1@138.463,207.485 P702.10@138.463,209.837
NetP702_11: P702.11 Q711.1 | length 12.7
  Bottom Layer w1: Q711.1@135.457,223.172 135.457,221.817 133.383,219.743 133.383,215.806 135.923,213.266 P702.11@135.923,212.377
NetP702_12: P702.12 R719.1 | length 2.4
  Bottom Layer w1: R719.1@135.923,207.485 P702.12@135.923,209.837
NetP702_13: P702.13 Q713.1 | length 6.9
  Bottom Layer w1: Q713.1@128.811,216.441 130.462,216.441 133.383,213.52 P702.13@133.383,212.377
NetP702_14: P702.14 R721.1 | length 2.4
  Bottom Layer w1: R721.1@133.383,207.485 P702.14@133.383,209.837
NetP702_15: P702.15 Q715.1 | length 14.5
  Bottom Layer w1: Q715.1@128.811,223.172 128.811,221.521 127.033,219.743 127.033,215.425 127.414,215.044 129.827,215.044 130.843,214.028 P702.15@130.843,212.377
NetP702_16: P702.16 R723.1 | length 2.4
  Bottom Layer w1: R723.1@130.843,207.485 P702.16@130.843,209.837
NetP800_1: P800.1 R814.1 | length 3
  Bottom Layer w1: P800.1@205.954,257.048 206.067,257.161 R814.1@206.067,260.008
NetP800_2: P800.2 R813.1 | length 3.1
  Bottom Layer w1: P800.2@201.041,257.135 P800.2@200.954,257.048 200.954,257.596 201.041,257.683 R813.1@201.041,260.008
NetP801_1: P801.1 R817.1 | length 3
  Bottom Layer w1: P801.1@221.125,257.066 R817.1@221.125,260.071
NetP801_2: P801.2 R816.1 | length 2.9
  Bottom Layer w1: P801.2@216.118,257.139 R816.1@216.118,260.008
NetP801_3: P801.3 R815.1 | length 2.9
  Bottom Layer w1: P801.3@210.983,257.084 R815.1@210.983,260.008
NetP802_1: P802.1 R820.1 | length 2.9
  Bottom Layer w1: P802.1@236.202,257.03 R820.1@236.202,259.881
NetP802_2: P802.2 R819.1 | length 2.9
  Bottom Layer w1: P802.2@231.194,257.102 R819.1@231.194,260.008
NetP802_3: P802.3 R818.1 | length 3
  Bottom Layer w1: P802.3@226.06,257.048 R818.1@226.06,260.008
NetP803_2: P803.2 R825.1 | length 6
  Bottom Layer w1: R825.1@240.03,262.561 241.213,261.378 P803.2@241.213,257.048
NetQ500_1: Q500.1 R504.2 | length 29
  Bottom Layer w0.7: R504.2@16.289,160.904 16.289,160.076 26.322,160.076 31.275,155.123 31.275,146.868 32.098,146.045 Q500.1@33.815,146.045
NetQ500_2: Q500.2 Q501.1 | length 3.6
  Bottom Layer w1: Q500.2@33.337,147.945 33.673,148.281 Q501.1@33.673,151.426
NetQ502_1: Q502.1 R509.2 | length 25.8
  Bottom Layer w1: Q502.1@79.598,237.98 81.027,237.98 81.469,237.538 81.469,231.188 85.726,226.931 R509.2@97.09,226.931
NetQ502_2: Q502.2 Q503.1 | length 3
  Bottom Layer w0.5: Q503.1@79.135,233.234 79.598,233.697 Q502.2@79.598,236.08
NetQ700_2: Q700.2 R700.1 | length 2.8
  Bottom Layer w1: Q700.2@14.892,65.55 14.892,62.837 R700.1@14.958,62.771
NetQ701_2: Q701.2 R701.1 | length 2.8
  Bottom Layer w1: Q701.2@148.75,217.584 151.478,217.584 R701.1@151.544,217.65
NetQ702_2: Q702.2 R702.1 | length 2.8
  Bottom Layer w1: Q702.2@21.623,65.55 21.623,62.774 R702.1@21.626,62.771
NetQ703_2: Q703.2 R703.1 | length 2.8
  Bottom Layer w1: Q703.2@148.623,224.315 151.351,224.315 R703.1@151.417,224.381
NetQ704_2: Q704.2 R706.1 | length 2.8
  Bottom Layer w1: Q704.2@14.892,72.112 14.892,69.399 R706.1@14.958,69.333
NetQ705_2: Q705.2 R708.1 | length 2.8
  Bottom Layer w1: Q705.2@142.146,217.584 144.874,217.584 R708.1@144.94,217.65
NetQ706_2: Q706.2 R715.1 | length 2.8
  Bottom Layer w1: Q706.2@21.623,72.112 21.623,69.336 R715.1@21.626,69.333
NetQ707_2: Q707.2 R717.1 | length 2.8
  Bottom Layer w1: Q707.2@142.019,224.315 144.838,224.315 R717.1@144.841,224.318
NetQ708_2: Q708.2 R724.1 | length 2.8
  Bottom Layer w1: Q708.2@14.892,78.673 14.892,75.96 R724.1@14.958,75.894
NetQ709_2: Q709.2 R725.1 | length 2.7
  Bottom Layer w0.5: Q709.2@135.542,217.838 138.143,217.838 R725.1@138.209,217.904
NetQ710_2: Q710.2 R726.1 | length 2.8
  Bottom Layer w1: Q710.2@21.623,78.673 21.623,75.897 R726.1@21.626,75.894
NetQ711_2: Q711.2 R727.1 | length 2.7
  Bottom Layer w0.5: Q711.2@135.457,224.442 138.149,224.442 R727.1@138.152,224.445
NetQ712_2: Q712.2 R728.1 | length 2.8
  Bottom Layer w1: Q712.2@14.892,85.235 14.892,82.522 R728.1@14.958,82.456
NetQ713_2: Q713.2 R729.1 | length 2.6
  Bottom Layer w1: Q713.2@128.811,217.711 R729.1@131.412,217.711
NetQ714_2: Q714.2 R730.1 | length 2.8
  Bottom Layer w1: Q714.2@21.623,85.235 21.623,82.459 R730.1@21.626,82.456
NetQ715_2: Q715.2 R731.1 | length 2.7
  Bottom Layer w1: Q715.2@128.811,224.442 131.417,224.442 R731.1@131.478,224.381
NetQ800_1: Q800.1 R807.2 | length 2.5
  Top Layer w0.6: Q800.1@241.461,282.387 R807.2@243.945,282.387
NetQ801_1: Q801.1 R808.2 | length 2.5
  Top Layer w0.6: Q801.1@241.461,285.943 R808.2@243.945,285.943
NetR200_1: R200.1 R201.2 U200.6 | length 4.8
  Bottom Layer w1: R201.2@13.876,41.675 R200.1@13.876,39.892 14.323,40.339 U200.6@16.67,40.339
NetR200_2: R200.2 U200.3 U200.7 | length 18.4
  Bottom Layer w0.5: U200.3@16.67,47.959 15.781,47.959 15.273,47.451 15.273,42.117 15.781,41.609 17.527,41.609
  Bottom Layer w1: R200.2@13.876,37.992 14.069,37.799 U200.7@16.67,37.799 17.813,37.799 18.702,38.688 18.702,40.974 18.067,41.609 17.527,41.609
NetR204_1: R204.1 U200.1 U200.2 | length 7.7
  Bottom Layer w1: R204.1@11.97,54.055 12.986,53.039 U200.1@16.67,53.039 U200.2@16.67,50.499
NetR205_1: R205.1 R207.2 U200.13 | length 4.2
  Bottom Layer w1: R207.2@22.131,48.909 R205.1@22.131,50.819 22.451,50.499 U200.13@24.29,50.499
NetR205_2: R205.2 U200.10 U200.14 | length 16.1
  Bottom Layer w1: U200.10@24.29,42.879 22.639,42.879 20.48,45.038 20.48,52.277 20.922,52.719 R205.2@22.131,52.719 22.451,53.039 U200.14@24.29,53.039
NetR208_1: R208.1 U200.8 U200.9 | length 15.5
  Bottom Layer w1: R208.1@11.97,36.188 22.679,36.188 U200.8@24.29,37.799 U200.9@24.29,40.339
NetR212_1: R212.1 R214.1 U201.2 | length 10.1
  Bottom Layer w1: R214.1@126.017,106.266 126.718,106.266 127.922,105.062 131.351,105.062 131.605,105.316 U201.2@131.605,106.84 131.605,107.602 131.031,108.176 R212.1@131.031,108.999
NetR212_2: R212.2 R213.1 U201.1 | length 7.3
  Bottom Layer w1: R213.1@125.127,111.793 127.921,108.999 R212.2@129.131,108.999 129.131,106.906 U201.1@129.065,106.84
NetR216_1: R216.1 R218.1 U201.6 | length 4.3
  Bottom Layer w1: R216.1@133.825,112.301 134.145,112.621 U201.6@134.145,114.46 R218.1@134.145,116.431
NetR216_2: R216.2 R217.1 U201.7 | length 11.5
  Bottom Layer w0.5: R217.1@125.127,114.715 R217.1@125.127,115.095
  Bottom Layer w0.7: R217.1@125.127,114.715 128.557,111.285
  Bottom Layer w1: 128.557,111.285 130.97,111.285 131.605,111.92 R216.2@131.605,112.621 ; U201.7@131.605,114.46 R216.2@131.605,112.621 ; R216.2@131.925,112.301 R216.2@131.605,112.621
NetR302_1: R302.1 U300.7 | length 2.2
  Top Layer w0.7: R302.1@101.125,64.991 U300.7@101.125,67.216
NetR402_2: R402.2 U400.2 | length 30.9
  Bottom Layer w0.7: R402.2@90.584,15.588 94.582,15.588 97.061,18.067 107.602,18.067 110.269,20.734 115.349,20.734 116.365,21.75 U400.2@116.365,24.29
NetR404_2: R404.2 U400.4 | length 29.2
  Bottom Layer w0.7: R404.2@97.442,15.334 101.313,15.334 102.903,16.924 108.11,16.924 110.666,19.48 119.175,19.48 121.445,21.75 U400.4@121.445,24.29
NetR406_2: R406.2 U400.6 | length 26.3
  Bottom Layer w1: R406.2@104.173,15.334 108.425,15.334 111.317,18.226 120.842,18.226 126.525,23.909 U400.6@126.525,24.29
NetR408_2: R408.2 U400.8 | length 25.4
  Bottom Layer w1: R408.2@111.92,15.461 111.92,16.464 112.428,16.972 122.128,16.972 125.128,19.972 129.827,19.972 131.605,21.75 U400.8@131.605,24.29
NetR410_2: R410.2 U400.11 | length 30.3
  Bottom Layer w0.5: 135.415,23.02 135.415,26.028
  Bottom Layer w1: R410.2@118.651,15.461 118.717,15.527 122.588,15.527 125.636,18.575 132.621,18.575 135.415,21.369 135.415,23.02 ; 135.415,26.028 136.685,27.298 U400.11@136.685,31.91
NetR412_2: R412.2 U400.13 | length 35.1
  Bottom Layer w0.8: U400.13@131.605,31.91 133.256,33.561 137.447,33.561 138.336,32.672 138.336,19.21
  Bottom Layer w1: R412.2@126.017,15.461 129.253,15.461 130.97,17.178 136.304,17.178 138.336,19.21
NetR414_2: R414.2 U400.15 | length 38
  Bottom Layer w0.8: U400.15@126.525,31.91 129.446,34.831 137.701,34.831 139.606,32.926 139.606,18.067
  Bottom Layer w1: R414.2@132.621,15.461 137,15.461 139.606,18.067
NetR416_2: R416.2 U400.17 | length 40.2
  Bottom Layer w0.8: U400.17@121.445,31.91 123.35,33.815 126.657,33.815 128.943,36.101 138.082,36.101 140.876,33.307 R416.2@140.876,15.461
NetR420_2: R420.2 U401.2 | length 42.5
  Bottom Layer w0.7: U401.2@116.365,46.579 122.629,40.315 135.9,40.315 142.146,34.069 142.146,27.973 143.863,26.256 R420.2@143.863,23.238
NetR422_2: R422.2 U401.4 | length 31.6
  Bottom Layer w0.7: U401.4@121.445,46.579 126.755,41.269 136.724,41.269 143.863,34.13 R422.2@143.863,30.096
NetR424_2: R424.2 U401.6 | length 23.2
  Bottom Layer w0.7: U401.6@126.525,46.579 128.24,44.864 131.193,44.864 132.61,43.447 133.282,43.447 134.506,42.223 141.404,42.223 143.863,39.764 R424.2@143.863,36.7
NetR426_2: R426.2 U401.8 | length 13
  Bottom Layer w0.7: U401.8@131.605,46.579 133.156,45.028 142.985,45.028 143.312,44.701 R426.2@143.863,44.701
NetR428_2: R428.2 U401.11 | length 8.4
  Bottom Layer w1: U401.11@136.685,54.199 139.162,54.199 142.055,51.305 R428.2@143.863,51.305
NetR430_2: R430.2 U401.13 | length 14.5
  Bottom Layer w1: U401.13@131.605,54.199 131.605,54.897 132.526,55.818 139.765,55.818 142.618,58.671 R430.2@143.863,58.671
NetR432_2: R432.2 U401.15 | length 25.6
  Bottom Layer w1: U401.15@126.525,54.199 126.525,55.532 128.065,57.072 139.241,57.072 142.72,60.551 143.863,60.551 R432.2@143.863,65.402
NetR434_2: R434.2 U401.17 | length 36.3
  Bottom Layer w1: U401.17@121.445,54.199 121.445,55.659 124.112,58.326 138.59,58.326 142.273,62.009 142.273,67.597 143.863,69.187 R434.2@143.863,72.768
NetR438_2: R438.2 U402.2 | length 48.3
  Bottom Layer w1: U402.2@116.365,67.216 116.778,67.216 118.683,65.311 120.617,65.311 124.587,61.341 136.77,61.341 140.876,65.447 140.876,77.875 139.338,79.413 R438.2@139.338,84.427
NetR440_2: R440.2 U402.4 | length 48.7
  Bottom Layer w0.5: U402.4@121.445,67.216 U402.4@121.445,67.47 ; 127.811,68.47 127.811,66.057 127.922,65.946
  Bottom Layer w1: U402.4@121.445,67.47 123.096,69.121 127.16,69.121 127.811,68.47 ; R440.2@125.876,84.554 125.876,82.579 127.825,80.63 132.918,80.63 135.156,78.392 136.812,78.392 138.336,76.868 138.336,66.454 137.32,65.438 127.922,65.438 127.922,65.946
NetR442_2: R442.2 U402.6 | length 39.2
  Bottom Layer w1: U402.6@126.525,67.216 126.525,64.168 137.823,64.168 139.606,65.951 139.606,77.371 137.331,79.646 135.676,79.646 132.607,82.715 R442.2@132.607,84.427
NetR444_2: R444.2 U402.8 | length 34.2
  Bottom Layer w0.5: 132.842,73.152 132.875,73.185 132.875,76.106
  Bottom Layer w1: R444.2@111.525,84.427 R444.2@111.539,84.427 114.14,84.427 116,82.567 122.341,82.567 126.786,78.122 130.859,78.122 132.875,76.106 ; U402.8@131.605,67.216 131.605,71.788 132.842,73.025 132.842,73.152
NetR446_2: R446.2 U402.11 | length 22.7
  Bottom Layer w1: R446.2@118.129,84.554 122.127,84.554 127.305,79.376 132.399,79.376 136.685,75.09 U402.11@136.685,74.836
NetR448_2: R448.2 U402.13 | length 31.4
  Bottom Layer w1: R448.2@104.159,84.3 108.806,84.3 111.793,81.313 121.821,81.313 126.266,76.868 129.573,76.868 U402.13@131.605,74.836
NetR450_2: R450.2 U402.15 | length 33
  Bottom Layer w0.7: R450.2@97.428,84.3 101.562,84.3 102.816,83.046 108.277,83.046 111.296,80.027 121.334,80.027 U402.15@126.525,74.836
NetR452_2: R452.2 U402.17 | length 35.7
  Bottom Layer w0.7: R452.2@90.062,84.3 90.062,83.613 90.708,82.967 101.249,82.967 102.124,82.092 107.458,82.092 110.777,78.773 117.508,78.773 U402.17@121.445,74.836
NetR504_1: R504.1 U500.2 | length 2
  Bottom Layer w1: R504.1@16.289,163.312 U500.2@16.289,165.347
NetR509_1: R509.1 U502.2 | length 2.2
  Bottom Layer w0.5: U502.2@97.09,222.806 R509.1@97.09,225.031
NetR602_2: R602.2 U600.1 U600.7 U600.8 | length 10.2
  Bottom Layer w1: U600.7@26.489,28.481 U600.8@26.489,25.941 26.555,26.007 R602.2@28.735,26.007 34.043,26.007 U600.1@34.109,25.941
NetR603_1: R603.1 R604.2 U600.5 | length 7.2
  Bottom Layer w1: U600.5@26.489,33.561 R604.2@30.071,33.561 30.071,31.336 30.579,30.828 R603.1@31.275,30.828
NetR700_2: R700.2 U700.2 | length 24
  Bottom Layer w0.5: 29.497,64.168 32.037,64.168
  Bottom Layer w1: R700.2@16.858,62.771 17.813,62.771 19.464,61.12 24.798,61.12 27.846,64.168 29.497,64.168 ; 32.037,64.168 32.926,64.168 34.196,65.438 U700.2@38.387,65.438
NetR701_2: R701.2 U701.2 | length 24.9
  Bottom Layer w0.5: 150.401,232.814 150.401,234.729
  Bottom Layer w0.7: U701.2@149.131,241.079 149.131,235.999 150.401,234.729 ; 150.401,232.814 150.401,231.935 151.036,231.3 152.052,231.3 153.703,229.649 153.703,222.537 151.544,220.378 R701.2@151.544,219.55
NetR702_2: R702.2 U700.5 | length 20.8
  Bottom Layer w0.5: 29.624,69.248 33.815,69.248
  Bottom Layer w1: R702.2@23.526,62.771 24.29,62.771 24.671,63.152 24.671,66.073 25.751,67.153 27.275,67.153 29.37,69.248 29.624,69.248 ; 33.815,69.248 37.625,73.058 U700.5@38.387,73.058
NetR703_2: R703.2 U701.5 | length 22.5
  Bottom Layer w0.5: 147.861,232.443 147.861,234.348
  Bottom Layer w0.7: U701.5@141.511,241.079 143.289,239.301 146.21,239.301 147.861,237.65 147.861,234.348 ; 147.861,232.443 147.861,227.617 151.036,227.617 151.417,227.236 R703.2@151.417,226.281